# Altium PCB PCB2.PcbDoc (part 2 of 3)
Units mm, origin at the board's own origin, x right, y up, seen from the top; angles counter-clockwise.
Board outline 227.2 x 157.1 mm, 2 copper layers (Top Layer, Bottom Layer); 299 components, 0 nets, 1015 pads, 1172 vias.
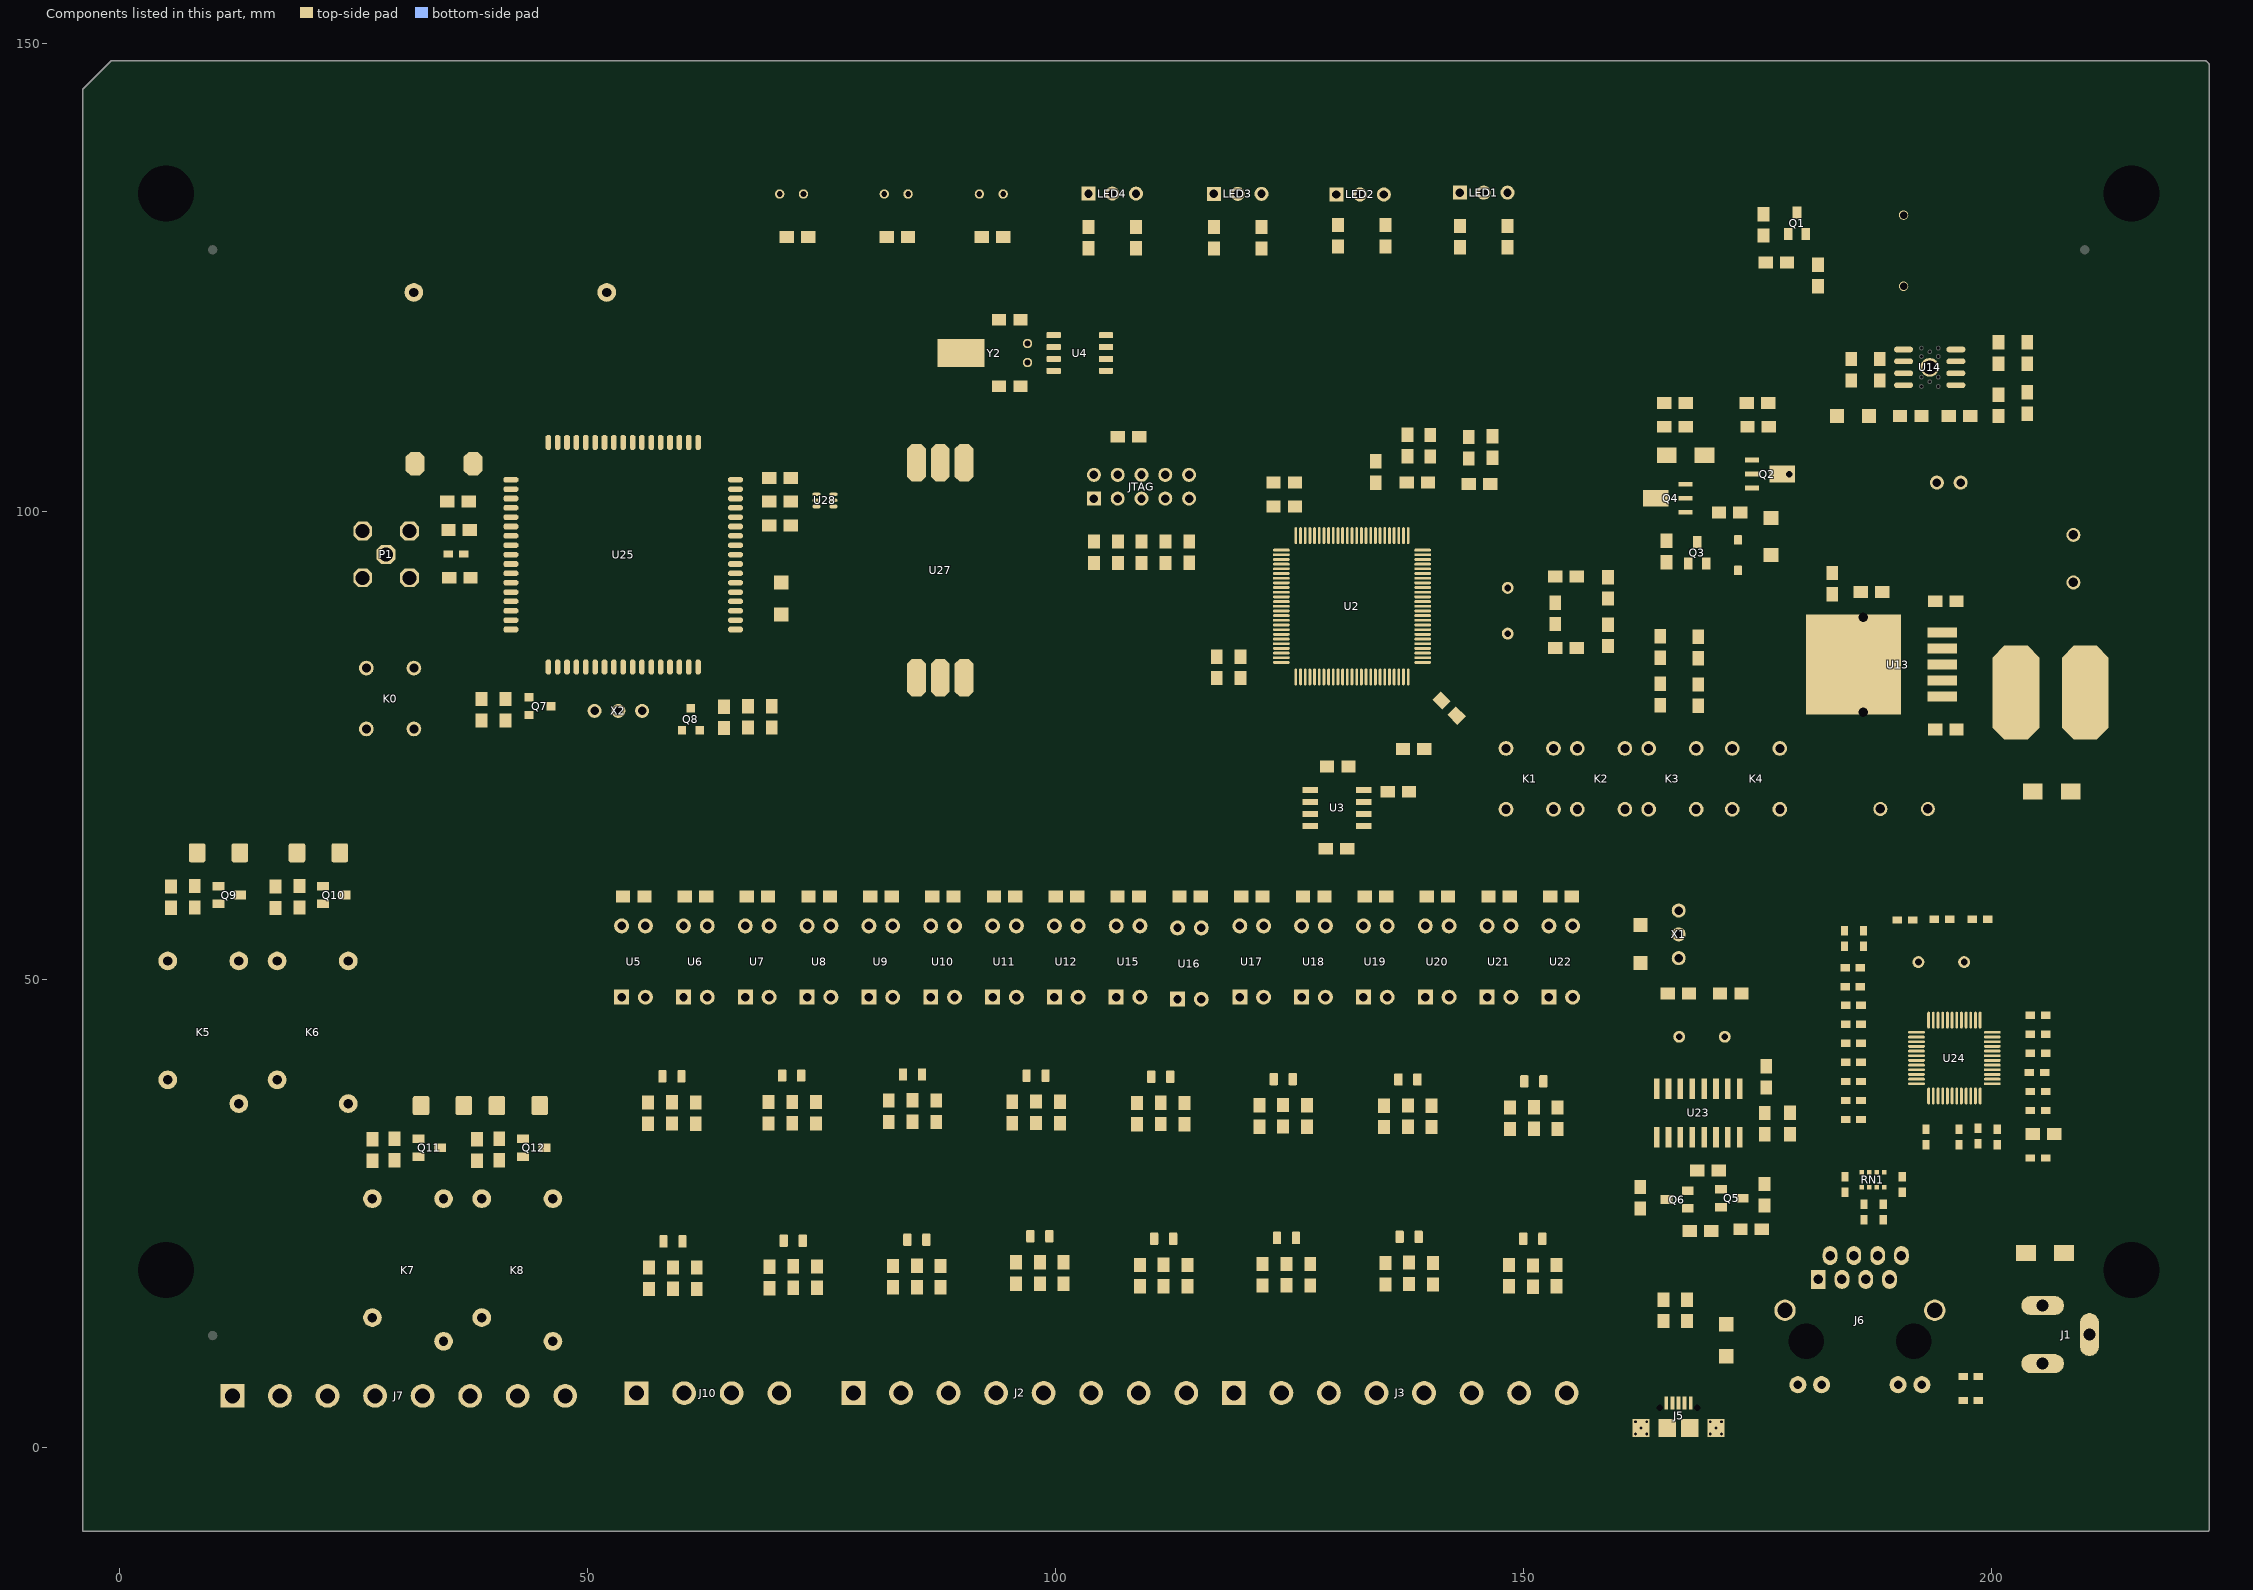
[diagram p2: the components of this part, seen from the top]

## Via types
v1: diameter 0.5, hole 0.3, Top Layer to Bottom Layer, tented both sides, 1160 vias
v2: diameter 1, hole 0.5, Top Layer to Bottom Layer, tented both sides, 8 vias
v3: diameter 0.7, hole 0.5, Top Layer to Bottom Layer, tented both sides, 2 vias
v4: diameter 0.7, hole 0.3, Top Layer to Bottom Layer, tented both sides, 1 vias
v5: diameter 1.2, hole 0.5, Top Layer to Bottom Layer, tented both sides, 1 vias

## Nets (pads, with @x,y where several pads share a name; then routed paths per layer and width w, separated by ;. In a path a pad name is that pad's centre, name@x,y a point inside that pad or via, vN(x,y) a via of type N, cw(c..) or ccw(c..) an arc to the next point about the centre after c; other vN are vias at no path point) (continued)
copper on no net: | length 9679.2
  Top Layer w0.254: 16.702,59.981 16.82,59.981 ; 27.078,32.973 27.181,32.973 ; 37.412,101.033 37.35,101.095 37.822,101.443 37.822,105.159 ; 37.468,95.507 37.54,95.435 37.55,95.425 ; 38.242,32.977 38.357,32.977 ; 38.738,79.744 38.738,80.013 ; 41.858,89.435 43.299,89.435 43.809,89.944 43.809,122.679 47.65,126.52 83.166,126.52 84.288,127.642 84.288,129.387 ; 41.858,90.435 41.858,91.435 41.858,92.435 41.858,93.435 41.858,94.435 ; 41.858,96.435 41.853,96.435 41.853,97.435 41.858,97.435 ; 41.858,101.435 41.858,102.435 ; 41.858,103.435 43.199,104.776 43.199,123.382 47.15,127.333 72.574,127.333 73.62,128.379 73.62,129.387 ; 42.625,80.201 43.786,80.201 ; 48.858,83.435 48.858,88.553 44.393,93.018 44.393,122.035 48.04,125.682 93.326,125.682 94.448,126.804 94.448,129.387 ; 50.858,107.435 51.858,107.435 ; 53.694,48.151 50.994,45.451 50.994,27.43 54.085,24.339 59.55,24.339 60.186,23.703 60.186,22.067 ; 53.694,59.079 53.694,65.697 54.4,66.403 112.1,66.403 ; 60.082,39.703 63.622,43.243 101.618,43.243 106.526,48.151 ; 60.298,48.151 58.946,46.799 55.635,46.799 51.502,42.665 51.502,27.641 54.295,24.847 72.45,24.847 73.038,24.259 73.038,22.143 ; 60.446,58.931 60.446,64.349 61.9,65.803 113,65.803 116.3,69.103 116.3,77.203 119.4,80.303 126.166,80.303 127.218,81.355 127.218,82.369 ; 61.606,34.623 61.606,29.547 62.75,28.403 154.55,28.403 155.15,27.803 155.15,14.103 154.418,13.371 126.592,13.371 119.094,5.873 ; 61.71,16.987 61.71,15.068 62.225,14.553 77.575,14.553 78.454,13.674 78.454,5.873 ; 62.04,76.679 64.422,76.679 64.646,76.903 64.838,76.903 ; 65.856,87.435 65.858,87.435 ; 65.858,99.435 v1(67.118,99.435) ; 66.902,48.151 65.042,46.291 55.846,46.291 52.01,42.455 52.01,27.851 54.506,25.355 85.313,25.355 86.25,24.418 86.25,22.243 ; 66.902,55.771 66.902,58.783 ; 67.05,58.783 67.05,58.931 67,58.881 67,64.203 68,65.203 113.3,65.203 116.8,68.703 116.8,76.903 119.7,79.803 126.428,79.803 127.718,81.093 127.718,82.369 ; 69.374,34.671 71.902,34.671 71.914,34.683 ; 69.472,103.635 69.488,103.635 ; 69.482,19.349 72.022,19.349 ; 72.022,19.403 72.022,19.349 ; 72.87,39.783 75.822,42.735 107.874,42.735 113.078,47.939 ; 73.506,48.151 71.138,45.783 56.056,45.783 52.518,42.245 52.518,28.061 54.716,25.863 98.55,25.863 99.39,25.023 99.39,22.619 ; 73.654,58.931 73.654,63.657 74.6,64.603 112.9,64.603 113.6,64.603 117.3,68.303 117.3,76.603 120,79.303 126.69,79.303 128.218,80.831 128.218,82.369 ; v1(73.732,100.587) 74.501,100.587 ; 74.454,34.671 74.454,29.799 75.342,28.911 154.76,28.911 155.658,28.013 155.658,13.893 154.628,12.863 131.164,12.863 124.174,5.873 ; 74.562,17.103 74.562,15.566 74.9,15.228 82.675,15.228 83.534,14.369 83.534,5.873 ; 74.562,19.389 74.522,19.349 72.022,19.349 ; 75.35,99.253 75.35,101.003 75.584,101.237 76.33,101.237 ; 76.33,100.587 77.159,100.587 77.55,100.978 77.55,103.127 ; 77.118,103.635 77.55,103.203 ; 80.11,48.151 77.234,45.275 56.267,45.275 53.026,42.034 53.026,28.272 54.927,26.371 111.55,26.371 112.61,25.311 112.61,22.343 ; 80.258,58.931 80.258,62.761 81.5,64.003 113.8,64.003 117.8,68.003 117.8,76.303 120.3,78.803 126.977,78.803 128.718,80.544 128.718,82.369 ; 81.752,133.959 81.752,129.637 82.002,129.387 ; 82.694,17.163 85.222,17.163 85.234,17.175 ; 85.782,39.903 88.106,42.227 113.81,42.227 119.734,48.151 ; 86.714,48.151 83.33,44.767 56.477,44.767 53.534,41.824 53.534,28.482 55.137,26.879 124.85,26.879 125.73,25.999 125.73,22.443 ; 86.862,58.931 86.862,62.265 88,63.403 114.1,63.403 118.3,67.603 118.3,76.003 120.6,78.303 127.239,78.303 129.218,80.282 129.218,82.369 ; 87.306,34.823 87.306,30.147 88.034,29.419 154.971,29.419 156.166,28.224 156.166,13.682 154.839,12.355 135.736,12.355 129.254,5.873 ; 87.774,17.163 88.614,16.323 88.614,5.873 ; 90.276,105.267 90.276,105.286 ; 93.318,48.151 89.426,44.259 56.688,44.259 54.042,41.613 54.042,28.693 55.348,27.387 137.85,27.387 138.838,26.399 138.838,22.551 ; 93.466,58.931 93.466,61.569 94.7,62.803 114.3,62.803 118.8,67.303 118.8,75.703 120.9,77.803 127.476,77.803 129.718,80.045 129.718,82.369 ; 93.694,5.873 93.694,14.397 94.775,15.478 100.55,15.478 100.914,15.842 100.914,17.539 ; 94.006,113.414 94.006,113.419 ; 98.774,5.873 108.688,15.787 113.43,15.787 114.134,16.491 114.134,17.263 ; 98.982,39.771 100.93,41.719 119.906,41.719 126.338,48.151 ; 99.922,48.151 95.522,43.751 56.898,43.751 54.7,41.553 54.7,28.903 55.708,27.895 57.4,27.895 151.158,27.895 152.054,26.999 152.054,22.343 ; 100.07,58.931 100.07,60.903 101.37,62.203 114.6,62.203 ; 100.506,34.691 100.506,30.747 101.326,29.927 155.181,29.927 156.674,28.434 156.674,13.472 155.005,11.803 140.264,11.803 134.334,5.873 ; 102.356,58.931 102.356,59.642 ; 103.566,128.161 103.566,126.919 104.15,126.335 112.35,126.335 114.218,124.467 122.368,124.467 127.718,119.117 127.718,97.469 ; 103.854,5.873 113.059,15.078 126.875,15.078 127.254,15.457 127.254,17.363 ; 104.15,103.963 104.15,106.785 105.392,108.027 106.69,108.027 ; 105.436,116.34 118.945,116.34 120.55,114.735 120.55,94.303 122.434,92.419 124.168,92.419 ; 105.436,117.61 119.275,117.61 121.25,115.635 121.25,94.569 122.9,92.919 124.168,92.919 ; 105.467,115.039 105.436,115.07 117.95,115.07 119.882,113.138 119.882,94.003 121.966,91.919 124.168,91.919 ; 106.572,59.033 106.674,58.931 106.674,60.703 107.574,61.603 114.9,61.603 119.8,66.503 119.8,75.203 121.4,76.803 128.025,76.803 130.718,79.496 130.718,82.369 ; 108.646,128.161 111.724,128.161 114.718,125.167 122.768,125.167 128.218,119.717 128.218,97.469 ; 108.934,5.873 117.448,14.387 139.546,14.387 140.362,15.203 140.362,17.471 ; 109.054,17.263 111.582,17.263 111.594,17.275 ; 109.799,66.403 112.1,66.403 ; 112.306,39.651 113.866,41.211 126.002,41.211 132.942,48.151 ; 113.278,58.931 113.278,59.081 120.3,66.103 120.3,74.903 121.7,76.303 128.338,76.303 131.218,79.183 131.218,82.369 ; 113.83,34.571 113.83,31.323 114.718,30.435 155.392,30.435 157.182,28.645 157.182,13.261 155.216,11.295 144.836,11.295 139.414,5.873 ; 114.014,5.873 122.02,13.879 152.754,13.879 153.578,14.703 153.578,17.263 ; 114.33,94.557 114.344,94.557 ; 114.6,62.248 114.6,62.203 ; 116.966,128.141 116.966,126.569 117.7,125.835 123,125.835 128.718,120.117 128.718,97.469 ; 117.265,84.534 117.353,84.622 ; 119.882,58.931 119.882,59.803 120.9,60.821 120.9,74.703 121.9,75.703 128.449,75.703 131.718,78.972 131.718,82.369 ; 122.046,128.141 129.218,120.969 129.218,97.469 ; v1@122.2,87.419 124.168,87.419 ; v1(122.9,86.919) 124.168,86.919 ; 124.168,83.919 125.204,83.919 ; 124.168,85.419 v1(125.47,85.419) ; 125.39,39.403 126.69,40.703 132.098,40.703 139.546,48.151 ; 125.622,103.127 126.218,102.531 126.218,97.469 ; 125.687,96.303 125.687,97.438 ; 125.687,97.469 125.687,97.438 ; 125.718,82.765 125.718,82.369 125.718,83.665 126.856,84.803 v1(127.45,84.803) ; 125.718,97.469 125.687,97.438 ; 125.814,59.603 125.3,60.117 125.3,74.403 125.9,75.003 128.562,75.003 133.218,79.659 133.218,82.369 ; 126.218,82.369 126.218,83.352 126.841,83.975 v1(127.095,83.975) ; 126.718,82.369 126.718,81.49 125.981,80.753 118.95,80.753 115.8,77.603 115.8,69.503 112.7,66.403 112.1,66.403 ; 126.914,34.323 126.914,31.939 127.91,30.943 155.602,30.943 157.69,28.855 157.69,13.051 155.426,10.787 149.408,10.787 144.494,5.873 ; 129.718,97.469 129.718,128.357 ; 129.718,127.845 130.23,128.357 ; 130.218,82.369 130.218,79.783 127.738,77.303 121.2,77.303 119.3,75.403 119.3,66.903 114.6,62.203 ; 130.218,97.469 130.218,103.503 ; 130.218,104.322 130.218,103.503 ; 130.718,97.469 130.718,119.935 130.718,119.953 135.3,124.535 142.15,124.535 143.25,125.635 143.25,128.261 ; 131.218,97.469 131.218,119.535 135.618,123.935 147.33,123.935 148.33,124.935 148.33,128.261 ; 131.338,72.813 131.338,73.333 ; 131.718,97.469 131.718,119.135 135.918,123.335 175.05,123.335 175.914,124.199 175.914,126.647 ; v1(131.8,84.103) 132.218,83.685 132.218,82.369 ; 132.218,98.75 132.218,97.469 132.218,102.471 132.874,103.127 134.258,103.127 ; 132.718,82.369 v1(132.718,84.203) ; 133.39,59.403 133.09,59.703 134.29,60.903 138.6,60.903 141.345,63.648 141.345,75.263 140.049,76.559 135.782,76.559 135.218,77.123 135.218,82.369 ; 134.718,97.469 v1@134.718,99.647 ; 135.218,97.469 v1@135.218,98.946 ; 135.31,128.357 135.31,126.027 130.218,120.935 130.218,103.503 ; 135.718,82.369 135.718,77.41 136.061,77.067 140.26,77.067 141.853,75.474 141.853,62.956 139.694,60.797 139.694,58.931 ; v1(135.718,96.193) 135.718,97.469 ; 136.218,82.369 136.218,78.002 136.646,77.575 140.47,77.575 142.621,75.424 142.621,62.608 146.298,58.931 146.298,55.919 146.15,55.771 ; 136.218,97.469 v1(136.218,99.977) ; 136.718,82.369 136.718,78.467 137.027,78.159 140.659,78.159 143.307,75.51 143.307,63.396 145.4,61.303 151.8,61.303 152.902,60.201 152.902,58.931 152.419,59.414 ; 136.718,96.294 136.718,97.469 ; 136.806,22.551 136.806,21.669 137.822,20.653 137.822,19.811 ; 137.218,97.469 137.218,98.871 137.338,98.991 v1(137.338,100.892) ; 137.56,103.127 137.56,102.103 137.96,101.703 142.325,101.703 142.775,101.253 142.775,95.128 141.566,93.919 139.268,93.919 ; v1(137.937,94.919) 139.268,94.919 ; 138.093,88.919 139.268,88.919 ; 138.702,39.359 144.506,39.359 146.15,41.003 146.15,48.151 ; 139.268,84.419 141.8,84.419 150.952,75.266 150.952,73.072 155.791,68.234 155.791,74.734 ; 139.268,84.919 142.3,84.919 150.869,76.35 155.626,76.35 ; 139.268,85.419 142.9,85.419 151.269,77.05 170.027,77.05 172.343,74.734 172.343,68.234 ; 139.268,89.419 145.934,89.419 148.355,86.998 152.419,86.998 153.435,88.014 153.435,85.474 ; 139.268,89.919 146.396,89.919 148.355,91.878 151.857,91.878 153.435,90.3 153.435,93.094 ; 139.268,91.419 142.141,91.419 145.873,95.151 160.51,95.151 161.45,94.212 v1(161.45,89.203) ; 139.268,91.919 141.916,91.919 145.707,95.71 161.018,95.71 ; 139.268,92.919 142.16,92.919 143.766,94.525 143.766,100.285 146.48,102.999 146.734,103.253 ; 139.268,93.419 141.766,93.419 143.258,94.911 143.258,101.52 142.55,102.228 140.745,102.228 139.846,103.127 ; 139.268,94.419 141.266,94.419 142.05,95.203 v1(142.05,101.053) ; 139.268,95.419 140.698,95.419 v1(141.3,96.021) ; 139.268,95.919 v1(139.268,96.771) ; 139.592,83.919 139.268,83.919 141.384,83.919 148.298,77.005 148.298,68.234 ; 140.226,34.279 140.226,32.327 141.102,31.451 155.812,31.451 158.198,29.066 158.198,12.84 151.23,5.873 149.574,5.873 ; v1(142.05,103.003) 144.19,103.003 ; 144.194,102.559 144.194,102.999 ; 150.022,22.343 150.022,21.415 151.038,20.399 151.038,19.549 151.038,19.503 ; 152.158,39.159 152.158,47.555 152.754,48.151 ; 153.682,34.079 153.682,32.771 154.494,31.959 156.023,31.959 158.675,29.307 158.675,9.894 154.654,5.873 ; 155.289,76.35 155.626,76.35 ; 155.764,74.734 155.791,74.734 ; 155.791,74.847 155.791,74.734 ; 159.069,87.951 159.071,87.951 ; 159.069,90.745 159.071,90.745 ; 159.071,85.665 159.527,85.665 ; v1(159.5,103.603) 159.5,99.203 163.3,95.403 163.3,88.066 164.653,86.713 ; 161.009,95.719 161.018,95.71 ; 162.51,25.587 163.194,24.903 166.906,24.903 167.59,25.587 ; 162.51,27.873 163.511,27.873 166.841,31.203 168.35,31.203 169.337,32.19 169.337,33.195 ; 163.411,68.234 163.411,74.734 161.795,76.35 155.626,76.35 ; 164.15,104.203 164.162,104.203 ; 164.162,101.457 164.162,104.203 ; 164.653,81.633 164.653,84.427 162.576,84.427 162,85.003 162,88.513 162.327,88.84 162.327,94.401 161.018,95.71 ; 164.997,104.05 164.997,105.72 ; 165,99.953 165,100.424 165.483,100.424 166.516,101.457 ; 165.45,101.003 165.45,101.457 166.516,101.457 ; 165.701,16.557 165.75,16.607 ; 167.362,101.457 166.516,101.457 ; 167.59,27.492 167.59,28.635 168.606,29.651 ; 167.902,4.923 167.902,4.802 167.902,7.404 ; 168.713,81.573 168.713,84.367 ; 168.713,86.653 168.713,90.658 169.75,91.695 173.66,91.695 176.506,94.541 176.506,95.385 ; 170.892,29.651 170.892,27.873 171.146,27.619 ; 173.147,38.395 173.147,38.832 174.129,38.832 174.457,38.503 ; 173.896,111.641 173.896,110.385 173.966,110.315 173.966,109.101 ; 174.474,104.045 175.837,104.045 ; 175.881,37.079 175.214,37.747 174.457,38.503 ; 175.97,38.503 174.457,38.503 ; v1(176.75,92.253) 176.1,91.603 176.1,59.403 178.8,56.703 184.34,56.703 ; 179.351,7.233 179.351,6.753 179.351,5.594 179.87,5.075 196.995,5.075 ; 181.882,6.753 181.882,7.785 202.9,28.803 207,28.803 208.4,30.203 208.4,46.403 207.1,47.703 199.8,47.703 198.824,46.727 198.824,45.701 ; 184.066,18.003 184.7,18.003 186.665,19.967 186.665,24.158 186.436,24.387 ; 184.066,18.483 184.723,18.483 ; 184.34,55.258 184.34,56.703 ; 186.038,78.306 186.328,78.596 ; 186.041,49.271 187.282,49.271 187.95,48.603 187.95,46.603 190.652,43.901 192.024,43.901 ; 186.041,51.303 187.75,51.303 188.55,50.503 188.55,46.903 191.052,44.401 192.024,44.401 192.852,44.401 v1(193.75,43.503) ; 186.097,35.103 188.15,35.103 189.15,36.103 189.15,39.503 190.048,40.401 192.024,40.401 191.048,40.401 ; 186.097,37.135 187.882,37.135 188.65,37.903 188.65,39.803 188.65,39.901 189.65,40.901 192.024,40.901 ; 186.097,39.167 186.816,39.167 189.05,41.401 192.024,41.401 ; 186.097,41.199 187.346,41.199 188.048,41.901 192.024,41.901 ; 186.097,43.231 187.122,43.231 187.952,42.401 192.024,42.401 ; 186.097,45.263 188.459,42.901 192.024,42.901 ; 186.097,47.295 189.991,43.401 192.024,43.401 ; 186.176,27.867 186.176,26.298 186.436,26.038 ; 186.182,27.873 v1(186.182,28.476) ; 186.328,88.756 186.328,86.727 185.278,85.677 185.278,83.695 ; 186.372,55.258 187,55.258 187.8,54.458 187.8,53.203 193.324,47.679 193.324,45.701 192.847,46.178 v1(192.2,46.178) ; 186.969,27.874 v1(186.969,28.476) ; 186.976,27.867 186.976,27.378 188.316,26.038 188.468,26.038 ; 187.776,27.867 v1(187.776,28.457) ; 187.876,20.543 188.468,21.135 188.468,24.387 ; v1@188.002,31.355 v1@188.011,31.364 ; v1(188.011,31.347) v1@188.011,31.364 ; 188.106,116.335 189.249,116.335 189.503,116.081 190.646,116.081 ; 188.36,91.443 188.36,83.695 185.282,83.695 ; 188.576,27.867 v1(188.576,28.457) ; 188.75,81.203 188.75,81.207 188.741,81.198 188.741,81.009 188.353,80.62 186.328,78.596 ; v1(188.808,31.361) 188.808,31.56 193.824,36.576 193.824,37.601 ; 190.057,6.753 188.8,8.01 188.8,13.703 203.2,28.103 207.4,28.103 209,29.703 209,46.803 207.5,48.303 199,48.303 197.824,47.127 197.824,45.701 ; 190.265,110.118 v1@190.265,112.093 ; 190.4,83.153 190.4,83.691 190.4,83.695 190.4,83.797 191.48,83.797 191.586,83.691 192.957,83.691 ; 191.643,56.391 192.234,55.8 192.234,51.911 195.824,48.321 195.824,45.701 ; 191.643,56.483 193.431,56.483 ; 192.024,38.901 192.948,38.901 193.15,39.103 194.65,39.103 ; 192.6,6.753 193.462,7.615 196.995,7.615 ; 193.04,34.039 193.04,34.693 v1(194.55,36.203) 194.824,36.477 194.824,37.601 ; 193.324,37.601 193.324,36.863 188.011,31.55 v1@188.011,31.364 ; 193.824,45.701 193.824,44.429 v1(195.05,43.203) ; 194.324,37.601 194.324,38.777 194.65,39.103 ; 194.324,45.701 v1(194.324,47.077) ; v1(194.513,32.363) 194.513,34.866 195.324,35.677 195.324,37.601 ; v1(194.824,44.403) 194.824,45.701 ; v1@195.15,33.074 195.15,34.703 195.824,35.377 195.824,37.601 ; 195.324,45.701 195.324,47.079 188.6,53.803 188.6,55.903 187.8,56.703 184.34,56.703 ; 195.58,56.483 198.003,56.483 197.114,55.594 197.114,51.911 196.324,51.121 196.324,45.701 ; 196.234,112.931 196.234,113.303 196.234,113.541 ; 196.824,45.701 196.824,39.229 196.95,39.103 ; 197.324,37.601 197.324,38.729 196.95,39.103 ; 197.824,37.601 197.824,34.948 198.614,34.158 ; v1@198.329,41.924 v1(198.352,41.901) 200.124,41.901 ; 200.124,39.401 199.052,39.401 v1(198.25,40.203) 198.448,40.401 200.124,40.401 ; 200.124,42.401 201.801,42.401 204.075,40.127 ; 200.124,43.401 201.348,43.401 202.138,44.191 204.202,44.191 ; 200.124,43.901 201.048,43.901 203.37,46.223 204.202,46.223 ; 164.162,104.203 164.162,104.885 164.997,105.72 ; 164.997,105.72 165.33,106.053 164.997,106.053 164.997,105.72 ; 185.278,83.695 185.282,83.695 ; 185.278,83.695 185.278,79.645 186.328,78.596 ; 185.278,83.695 185.282,83.695 ; 192.957,83.691 194.778,83.691 192.957,83.691 ; 194.65,39.103 196.95,39.103 ; 190.646,114.811 190.9,114.811 190.646,114.811
  Top Layer w0.3: 5.542,59.989 5.542,67.145 7.3,68.903 111.4,68.903 113.4,70.903 113.4,86.903 116.416,89.919 124.168,89.919 ; 16.702,59.981 15.3,61.383 15.3,66.003 17.5,68.203 111.7,68.203 114,70.503 114,74.903 114,86.503 116.916,89.419 124.168,89.419 ; 29.442,33.861 29.442,63.945 33.1,67.603 112,67.603 114.6,70.203 114.6,86.103 117.416,88.919 124.168,88.919 ; 38.242,32.977 38.242,63.545 41.7,67.003 112.4,67.003 115.2,69.803 115.2,85.803 117.816,88.419 124.168,88.419 ; 71.758,98.555 73.732,100.529 v1(73.732,100.587) ; 71.758,101.095 71.9,101.237 v1(73.216,101.237) 73.22,101.241 74.497,101.241 74.501,101.237 ; 117.265,84.534 117.381,84.419 124.168,84.419 ; v1(119.5,86.203) 119.716,86.419 124.168,86.419 ; v1(120.72,87.709) 120.93,87.919 124.168,87.919 ; 125.204,83.919 125.657,84.372 ; 132.974,66.463 137.421,66.463 139.211,68.253 139.211,71.326 137.234,73.303 135.518,73.303 134.218,74.603 134.218,82.369 ; 133.718,82.369 133.718,74.203 135.218,72.703 137,72.703 137.814,71.889 137.814,70.107 ; 134.718,82.369 134.718,75.485 135.524,74.679 137.16,74.679 137.16,74.543 138.8,72.903 v1(139.1,72.903) ; 137.218,82.369 137.218,81.235 138.25,80.203 ; 137.718,97.469 v1(138.566,97.469) ; 139.268,88.419 140.966,88.419 v1(141.25,88.703) ; 139.268,90.419 142.251,90.419 v1(142.491,90.659) ; v1(144.1,73.003) 144.1,63.803 145.9,62.003 156.8,62.003 160.4,58.403 160.4,21.803 161.55,20.653 176.479,20.653 177.063,21.237 177.063,25.251 176.403,25.911 175.768,25.911 ; 168.606,29.651 168.606,30.159 170.607,32.16 170.607,33.195 ; 196.582,34.031 196.824,34.273 v1(196.824,36.203) 196.824,37.601 ; 197.324,45.701 197.324,43.329 ; 200.124,39.901 201.152,39.901 v1(201.697,39.356) 202.55,38.503 202.55,36.403 202.89,36.063 204.202,36.063 ; 200.646,34.031 200.646,34.207 v1(198.598,36.255) 198.324,36.529 198.324,37.601 198.324,39.129 197.324,40.129 197.324,41.429 ; 204.202,38.095 203.958,38.095 201.152,40.901 200.124,40.901 197.852,40.901 197.324,41.429 ; 204.202,42.159 203.46,42.901 v1(201.8,42.901) 200.124,42.901 197.752,42.901 197.324,43.329 ; 197.324,41.429 197.324,43.329
  Top Layer w0.4: 31.496,76.815 31.496,83.315 31.616,83.435 45.858,83.435 45.858,79.529 46.136,79.251 ; 60.858,83.435 60.858,79.261 61.09,79.029 61.25,79.189 64.646,79.189 ; 74.501,101.887 75.334,101.887 ; 87.736,85.576 87.736,82.267 v1(87.736,100.317) ; 164.986,13.557 165.952,12.591 165.952,4.802 ; 166.602,4.802 166.602,12.633 167.526,13.557 ; v1(166.75,18.664) 166.75,16.619 167.526,15.843 ; v1(166.797,36.885) 166.797,38.395 ; v1(168.067,36.809) 168.067,38.395
  Top Layer w0.5: 5.542,57.051 5.542,57.703 5.542,56.161 11.7,50.003 v1(20.5,50.003) ; 5.542,59.989 5.576,60.023 10.622,60.023 ; 8.082,57.737 10.241,57.737 10.622,58.118 ; 8.336,63.579 v1(9.924,63.579) ; 12.798,52.027 12.908,52.137 12.908,59.07 ; 12.908,53.737 12.908,59.07 ; 12.908,63.579 12.908,59.07 ; 16.702,57.695 16.702,55.801 20.5,52.003 v1(20.5,50.003) ; 16.702,59.981 16.744,60.023 21.798,60.023 ; v2(16.826,63.579) 19.004,63.579 ; 19.258,57.737 21.417,57.737 21.798,58.118 ; 20.684,30.687 27.078,30.687 27.078,30.129 ; 23.576,63.579 24.084,63.071 24.084,59.07 ; 24.084,54.025 24.084,59.07 ; 24.482,52.027 24.084,52.425 24.084,59.07 ; 27.078,32.973 27.128,33.023 31.982,33.023 ; 29.442,30.737 31.601,30.737 31.982,31.118 ; 31.496,123.447 31.496,132.931 36.337,137.772 96.7,137.772 ; 32.334,36.503 32.258,36.579 v1(33.924,36.579) ; 34.666,26.627 34.268,27.025 34.268,32.07 36.83,34.632 36.83,36.579 ; 37.468,98.047 38.08,97.435 41.853,97.435 41.858,97.435 ; 37.54,95.435 41.858,95.435 ; 37.55,92.967 37.55,95.425 ; 38.242,30.294 38.242,30.691 36.5,28.949 36.5,24.947 35,23.447 21.856,23.447 20.5,24.803 v1(20.5,50.003) ; 38.288,33.023 43.158,33.023 ; 38.738,77.727 38.738,76.124 39.675,75.187 52.476,75.187 53.34,76.051 53.34,78.743 ; 38.738,80.013 38.926,80.201 43.786,80.201 ; 40.364,36.579 v1(42.174,36.579) ; 40.618,30.737 42.777,30.737 43.158,31.118 ; 41.278,77.727 43.212,77.727 43.786,78.301 ; 44.936,36.579 45.444,36.071 45.444,32.07 45.444,27.533 46.35,26.627 ; 53.694,55.771 53.694,58.783 ; 53.858,83.435 v1(53.858,85.345) ; 54.858,83.435 v1(54.858,84.845) ; 56.128,58.931 57.322,58.931 58.25,58.003 58.25,54.303 v1(58.85,53.703) 78.05,53.703 ; 56.526,36.909 56.526,38.179 58.05,39.703 ; 56.63,19.273 56.63,20.543 58.154,22.067 ; 57.858,105.011 57.858,107.435 ; 60.14,76.679 60.14,75.289 60.776,74.654 66.796,74.654 67.186,75.044 67.186,76.965 69.726,76.965 ; 60.446,55.919 60.446,58.931 ; 62.732,58.931 64.122,58.931 64.85,58.203 64.85,53.803 ; 63.1,98.503 63.168,98.435 65.858,98.435 ; 64.1,88.003 64.668,87.435 65.858,87.435 69.147,87.435 70.742,89.03 ; 65.858,95.435 67.766,95.435 70.742,92.459 ; 65.858,100.435 64.357,100.435 63.925,100.866 63.925,103.914 64.535,104.524 68.583,104.524 69.472,103.635 ; 65.858,101.435 66.592,101.435 69.472,98.555 ; 65.858,102.435 67.818,102.435 69.158,101.095 69.472,101.095 ; 69.336,58.931 70.922,58.931 71.45,58.403 71.45,53.803 ; 69.374,36.957 69.374,38.319 70.838,39.783 ; 69.482,19.349 69.482,20.619 71.006,22.143 ; 69.726,79.251 v1(69.726,85.398) ; 70.576,133.959 70.576,130.145 71.334,129.387 ; 71.758,103.635 77.118,103.635 83.564,103.635 85.196,105.267 ; 73.654,55.919 73.654,58.931 ; 75.94,58.931 77.322,58.931 78.05,58.203 78.05,53.703 ; 80.258,55.919 80.258,58.931 ; 82.226,37.109 82.226,38.379 83.75,39.903 ; 82.544,58.931 84.222,58.931 84.75,58.403 84.75,53.703 ; 82.694,19.449 82.694,20.719 84.218,22.243 ; 85.196,85.157 85.196,82.267 85.261,82.332 v1(85.261,99.876) ; 86.862,55.919 86.862,58.931 ; 89.148,58.931 90.822,58.931 91.25,58.503 91.25,53.703 ; 90.276,85.917 90.276,82.267 v1(90.276,100.384) ; 91.912,133.959 91.912,129.637 92.162,129.387 ; 93.466,55.919 93.466,58.931 ; 95.426,36.977 95.426,38.247 96.95,39.771 ; 95.752,58.931 97.122,58.931 97.85,58.203 97.85,53.803 ; 95.834,19.825 95.834,21.095 97.358,22.619 ; 96.882,137.772 99.3,135.354 99.3,125.016 105.436,118.88 ; 100.07,55.919 100.07,58.931 ; 102.356,58.931 103.722,58.931 104.45,58.203 104.45,53.703 ; 103.566,130.447 103.566,134.003 ; 106.674,55.919 106.674,58.931 ; 108.646,130.447 108.646,134.003 ; 108.75,36.857 108.75,38.127 110.274,39.651 ; 108.96,58.931 110.522,58.931 111.05,58.403 111.05,53.703 ; 109.054,19.549 109.054,20.819 110.578,22.343 ; 113.278,55.759 113.278,58.931 ; 115.564,58.931 117.122,58.931 117.65,58.403 117.65,53.703 ; 116.966,130.427 116.966,133.983 ; 119.882,55.919 119.882,58.931 ; 121.834,36.609 121.834,37.879 123.358,39.403 ; 122.046,130.427 122.046,133.983 ; 122.168,58.931 123.722,58.931 124.25,58.403 124.25,53.703 ; 122.174,19.649 122.174,20.919 123.698,22.443 ; 125.595,84.434 130.064,88.903 ; 125.687,96.303 125.687,96.077 126.761,95.003 136.265,95.003 136.718,95.456 ; 126.486,55.919 126.486,58.931 ; 127.274,70.273 129.052,72.051 129.052,72.813 ; 128.772,58.931 130.322,58.931 130.95,58.303 130.95,53.703 ; 128.924,64.011 129.35,64.437 129.35,69.503 130.1,70.253 ; 130.042,133.911 130.042,130.831 130.23,130.643 ; 130.12,70.273 132.974,70.273 ; 130.188,88.903 v2@136.718,88.903 ; 131.21,64.011 132.455,64.011 132.974,64.53 132.974,66.463 ; 131.338,72.813 132.974,71.177 132.974,70.273 ; 132.942,55.771 133.09,55.919 133.09,58.931 ; 132.974,67.733 133.967,67.733 134.588,68.354 137.281,68.354 137.814,68.888 137.814,70.107 ; 135.122,133.911 135.122,130.831 135.31,130.643 ; 135.146,36.565 135.146,37.835 136.67,39.359 ; 135.282,19.757 135.282,21.027 136.806,22.551 ; 135.376,58.931 136.922,58.931 137.45,58.403 137.45,53.703 ; v1(136.7,71.803) 135.9,71.803 135.528,71.431 135.528,70.107 135.362,70.273 132.974,70.273 ; 136.718,96.294 v1(136.718,92.803) v2@136.718,88.903 ; v2(136.75,88.903) 138.077,88.903 ; 139.546,55.771 139.694,55.919 139.694,58.931 ; 141.417,79.991 136.718,84.69 v2@136.718,88.903 ; 141.98,58.931 v1(143.522,58.931) ; 143.25,130.547 143.25,134.103 ; 148.33,130.547 148.33,134.103 ; 148.498,19.549 148.498,20.819 150.022,22.343 ; 148.584,58.931 v1(150.222,58.931) ; 148.602,36.365 148.602,37.635 150.126,39.159 ; 152.754,55.771 152.902,55.919 152.902,58.931 ; 155.188,58.931 v1(156.722,58.931) 157.35,58.303 157.35,54.403 156.65,53.703 137.45,53.703 ; v1(157.223,91.574) 158.68,93.031 159.071,93.031 ; v5(157.45,112.103) 157.45,117.985 160.3,120.835 179.5,120.835 181.502,122.837 181.502,124.107 ; v1(158.7,67.44) 158.7,62.793 158.7,62.791 166.624,54.867 ; v1(162.3,34.003) 162.3,51.539 162.56,51.799 ; 162.56,55.883 166.116,52.327 166.624,52.327 ; 164.162,101.457 165.45,101.457 ; 164.257,38.395 164.257,47.36 165.444,48.547 165.444,45.149 166.67,43.923 ; v2(164.4,6.403) 165.302,5.501 165.302,4.802 ; 164.986,15.843 165.651,16.508 165.75,16.508 165.75,16.607 v1(165.75,18.689) ; 165.304,26.539 v1(165.304,27.949) ; 165.527,38.395 165.527,39.98 169.47,43.923 171.55,43.923 173.318,45.691 173.318,48.547 ; v1(165.958,23.195) 167.806,23.195 ; v1(167.114,84.367) 168.713,84.367 ; 167.362,99.957 170.918,99.957 170.918,97.971 169.724,96.777 168.593,96.777 ; 167.64,94.491 165.462,94.491 165.33,94.623 165.33,93.423 166.141,92.611 172.263,92.611 172.95,93.299 172.95,93.759 ; 169.337,38.395 169.337,41.24 170.1,42.003 174.756,42.003 175.97,40.789 ; 170.092,23.195 170.092,21.911 v1(170.5,21.503) 175.1,21.503 175.5,21.903 175.5,23.363 ; 170.607,38.395 v1(170.607,39.903) ; 171.146,25.714 171.146,25.431 173.214,23.363 ; v2(171.704,7.899) 172.999,7.899 173.863,8.763 173.863,16.64 178.029,20.806 178.029,33.046 178.5,33.517 ; 171.877,38.395 v1(171.877,40.603) ; 173.482,26.648 173.482,26.666 173.482,27.537 174.142,28.197 175.768,28.197 ; 173.896,111.641 173.896,110.385 173.896,109.101 173.896,106.123 174.474,105.545 ; 174.474,104.045 175.837,104.045 176.4,104.045 ; 175.67,129.525 178.138,129.525 178.308,129.695 178.308,126.755 178.2,126.647 ; 179.534,131.707 190.646,131.707 ; 183.026,91.189 185.82,91.189 186.074,91.443 ; 184.39,49.271 184.39,41.255 184.446,41.199 ; 184.404,28.959 184.912,29.467 186.176,29.467 186.976,29.467 ; 184.446,35.103 184.446,30.924 184.81,30.559 187.427,30.559 187.776,30.21 187.776,29.467 188.576,29.467 189.992,29.467 190.5,28.959 ; 185.058,116.335 185.312,116.081 188.106,116.081 189.503,116.081 190.646,116.081 ; 185.282,83.695 185.282,83.691 190.4,83.691 191.586,83.691 192.957,83.691 194.778,83.691 ; 188.106,114.049 188.896,114.049 189.658,114.811 190.646,114.811 ; 192.551,110.239 195.472,110.239 ; 194.778,85.391 192.762,85.391 192.15,86.003 192.15,90.024 192.577,90.451 194.016,90.451 194.016,93.769 195.15,94.903 ; 196.234,114.811 198.52,114.811 200.806,112.525 ; 196.234,116.081 200.552,116.081 200.806,115.827 ; 196.234,117.351 v1(198.102,117.351) 198.15,117.303 198.15,119.003 199.05,119.903 204.65,119.903 205.65,118.903 205.65,116.703 204.774,115.827 203.854,115.827 203.854,112.779 ; 200.806,110.239 201.06,110.493 203.854,110.493 ; 200.806,118.113 203.854,118.113 ; 205.853,36.063 205.853,38.095 205.853,42.159 205.853,44.191 205.853,46.223 ; 78.05,53.703 84.75,53.703 ; 84.75,53.703 91.25,53.703 ; 91.25,53.703 104.45,53.703 ; 104.45,53.703 111.05,53.703 ; 111.05,53.703 117.65,53.703 ; 117.65,53.703 124.25,53.703 ; 124.25,53.703 130.95,53.703 ; 130.95,53.703 137.45,53.703
  Top Layer w0.6: 96.292,113.419 97.054,114.181 97.054,115.959 97.435,116.34 99.848,116.34 ; 96.292,120.531 97.054,119.769 97.054,117.991 97.435,117.61 99.848,117.61
  Top Layer w0.7: 99.848,118.88 v2(99.848,120.433) 101.752,120.433 102.65,119.535 102.65,102.023 103.25,101.423 ; 104.15,103.963 104.15,101.423 103.25,101.423 ; 106.69,101.423 106.69,96.857 106.71,96.837 ; 108.976,108.027 108.976,104.217 109.23,103.963 ; 109.23,101.423 109.23,96.857 109.25,96.837 ; 111.77,101.423 111.77,96.857 111.79,96.837 ; 111.79,94.551 109.25,94.551 106.71,94.551 104.17,94.551 102.302,94.551 101.75,95.103 101.75,100.503 102.67,101.423 103.25,101.423 ; 114.31,101.423 114.31,96.863 114.33,96.843 ; 127.274,66.463 127.274,67.733 127.274,69.003 127.274,70.273 ; v1(181.65,48.103) 181.65,50.403 182.55,51.303 184.39,51.303 184.34,51.353 184.34,53.607 186.372,53.607 ; v4(182,39.903) 182,24.359 185.336,21.023 185.336,20.543 ; v4@182.025,39.928 182.786,39.167 184.446,39.167 184.446,37.135 184.446,35.103 ; 198.646,5.075 v1(198.646,6.403) 198.646,7.615 ; 204.202,30.983 204.202,36.063
  Top Layer w1: 12.798,52.027 13.072,52.301 ; 28.522,95.451 28.578,95.507 35.182,95.507 35.182,98.047 ; 37.166,5.913 37.506,5.573 ; 38.17,101.07 39.804,99.435 41.858,99.435 ; 56.526,34.623 59.038,34.623 59.066,34.651 ; 56.526,36.909 59.066,36.909 61.606,36.909 ; 56.63,16.987 59.158,16.987 59.17,16.999 ; 56.63,19.273 59.17,19.273 ; 59.17,19.285 59.17,19.273 ; 61.71,19.273 59.17,19.273 ; 69.374,36.957 71.914,36.957 ; 69.482,17.063 71.968,17.063 72.022,17.117 ; 71.914,36.969 71.914,36.957 ; 74.454,36.957 71.914,36.957 ; 82.226,34.823 84.738,34.823 84.766,34.851 ; 82.226,37.109 84.766,37.109 87.306,37.109 ; 82.694,19.449 85.234,19.449 ; 85.234,19.461 85.234,19.449 ; 87.774,19.449 85.234,19.449 ; 95.426,34.691 97.938,34.691 97.966,34.719 ; 95.426,36.977 97.966,36.977 100.506,36.977 ; 95.834,17.539 98.362,17.539 98.374,17.551 ; 95.834,19.825 98.374,19.825 ; 98.374,19.837 98.374,19.825 ; 100.914,19.825 98.374,19.825 ; 108.75,34.571 111.262,34.571 111.29,34.599 ; 108.75,36.857 111.29,36.857 113.83,36.857 ; 109.054,19.549 111.594,19.549 ; 111.594,19.561 111.594,19.549 ; 114.134,19.549 111.594,19.549 ; 117.265,82.248 119.805,82.248 122.901,82.248 124.168,83.515 ; 121.834,34.323 124.33,34.323 124.358,34.351 ; 121.834,36.609 124.358,36.609 126.914,36.609 ; 122.174,17.363 124.702,17.363 124.714,17.375 ; 122.174,19.649 124.714,19.649 ; 123.336,103.127 123.336,100.587 123.336,99.417 125.35,97.403 ; 124.714,19.661 124.714,19.649 ; 127.254,19.649 124.714,19.649 ; 135.146,34.279 137.658,34.279 137.686,34.307 ; 135.146,36.565 137.686,36.565 140.226,36.565 ; 135.282,17.471 137.768,17.471 137.822,17.525 ; 135.282,19.757 137.822,19.757 140.362,19.757 ; 137.56,103.127 137.646,103.213 137.646,105.945 ; 137.646,108.231 137.646,109.799 138.35,110.503 140.85,110.503 ; 139.846,103.127 140.082,103.363 140.082,105.929 ; v2(141.85,115.503) 140.85,114.503 140.85,113.403 140.85,110.503 ; 144.194,102.999 144.194,105.707 ; 144.194,107.993 144.194,109.659 143.35,110.503 140.85,110.503 ; 146.734,103.253 146.734,105.793 ; 148.498,17.263 150.992,17.263 151.038,17.217 ; 148.498,19.549 151.038,19.549 153.578,19.549 ; 148.602,34.079 151.114,34.079 151.142,34.107 ; 148.602,36.365 151.142,36.365 153.682,36.365 ; 155.721,85.474 158.88,85.474 159.071,85.665 ; 159.069,87.951 159.071,87.953 159.071,90.745 ; 167.73,48.547 171.032,48.547 ; v2(171.704,7.899) 171.704,9.782 ; 171.922,13.429 171.704,13.211 171.704,15.385 v2(171.922,15.603) ; 172.95,97.011 172.95,99.703 173.204,99.957 175.884,99.957 176.506,99.335 ; 173.561,33.609 178.408,33.609 ; 175.814,35.795 175.97,35.951 175.97,37.079 175.97,38.503 ; 176.252,109.101 181.528,109.101 183.026,107.603 ; 176.506,95.385 182.808,95.385 ; 181.502,126.393 188.36,126.393 190.646,124.107 ; 185.058,114.049 188.106,114.049 ; 194.202,103.127 195.472,104.397 195.472,110.239 ; 194.778,81.991 197.55,81.991 ; 196.234,113.303 197.758,111.779 197.758,110.239 197.758,104.143 196.742,103.127
  Top Layer w1.5: 167.362,108.803 169.38,106.785 ; 167.362,109.101 167.362,111.641 ; 169.38,106.053 169.38,106.785 ; 169.38,106.429 169.38,106.785 ; 183.026,95.177 183.026,107.603 183.026,109.731 183.534,110.239 ; 183.3,94.203 183.95,94.853 ; 184.454,94.903 193.973,94.903 195.15,94.903 206.344,94.903 208.788,92.459 210.058,91.189 210.058,80.703 ; 193.4,79.703 193.242,79.545 193.242,69.599 193.242,68.261 194.9,66.603 210.6,66.603 214.6,62.603 214.6,27.647 207.776,20.823 ; 203.726,20.823 203.726,16.99 205.504,15.212
  Top Layer w1.7: 202.658,80.703 202.658,71.917 204.444,70.131
  Top Layer w2: 12.798,36.787 17.186,32.399 17.186,23.003 22,18.189 22,11.003 17.186,6.189 17.186,5.573 ; 27.066,13.927 27.066,10.933 32.426,5.573 ; 34.666,11.387 34.666,8.413 37.506,5.573 ; 37.822,105.159 v2(37.822,109.875) ; 38.75,13.927 38.75,9.409 42.586,5.573 ; 46.35,11.387 46.35,6.889 47.666,5.573 ; v5(157.45,112.103) 164.162,105.391 ; 197.55,81.991 201.37,81.991 202.658,80.703
  Bottom Layer w0.254: v1(53.858,85.345) 53.858,105.21 55.839,107.191 122.012,107.191 122.83,106.373 131.734,97.469 v1(138.566,97.469) ; 54.858,85.103 54.858,105.134 56.382,106.658 121.745,106.658 131.632,96.771 v1(139.268,96.771) ; v1(73.732,100.587) v1@73.79,100.529 ; 106.69,101.423 106.69,98.158 107.309,97.539 122.244,97.539 123.844,95.939 123.844,83.823 124.631,83.036 132.023,83.036 132.718,83.731 v1(132.718,84.203) ; 109.23,101.423 109.23,99.326 109.925,98.631 122.523,98.631 124.53,96.625 124.53,84.356 124.911,83.975 v1(127.095,83.975) ; 109.23,103.963 110.523,102.67 122.549,102.67 126.9,98.318 126.9,86.33 129.127,84.103 v1(131.8,84.103) ; 111.77,101.423 111.77,100.24 112.338,99.673 122.8,99.673 125.47,97.003 v1(125.47,85.419) ; 114.31,101.423 122.779,101.423 126.2,98.002 126.2,86.053 v1(127.45,84.803) ; v1(122.2,87.403) 122.2,83.703 124.3,81.603 124.3,44.103 128.3,40.103 170.407,40.103 v1(170.607,39.903) ; v1(122.9,86.919) 122.9,83.803 124.8,81.903 124.8,44.303 128.5,40.603 v1(171.877,40.603) ; v1(134.722,99.647) 135.661,99.647 136.576,98.733 139.344,98.733 140.919,97.158 174.598,97.158 176.122,95.634 176.122,61.481 189.8,47.803 194.9,47.803 195.65,47.053 195.65,43.803 v1(195.05,43.203) ; v1@135.218,98.946 135.233,98.946 v1@135.276,98.989 ; v1(135.218,99.046) v1@135.276,98.989 ; v1(135.718,96.193) 136.515,95.396 172.958,95.396 174.25,94.104 174.25,88.128 174.25,87.938 174.25,60.878 190.725,44.403 v1(194.824,44.403) ; v1(136.218,99.977) 136.929,99.266 139.598,99.266 141.224,97.641 175.175,97.641 176.75,96.066 v1(176.75,92.253) ; v1(137.937,94.919) 172.292,94.919 173.7,93.511 173.7,60.653 190.45,43.903 193.35,43.903 v1(193.75,43.503) ; v1(141.3,96.021) 141.433,95.888 173.761,95.888 174.9,94.749 174.9,61.103 189.825,46.178 v1(192.2,46.178) ; v1(142.05,101.053) v1(142.05,103.003) ; v1(159.5,103.603) 178.05,103.603 178.45,104.003 ; v1(161.45,89.203) 166.286,84.367 v1(167.114,84.367) ; 181.526,18.003 182.135,18.003 184.074,19.942 184.074,22.38 188.576,26.883 v1(188.576,28.457) 188.576,31.129 v1(188.808,31.361) ; 181.526,18.483 182.158,18.483 ; 182.796,20.543 183.134,20.881 183.134,22.33 187.776,26.972 v1(187.776,28.457) 187.776,31.129 v1@188.002,31.355 ; v1@186.207,28.451 v1(186.182,28.476) 186.182,31.855 187.274,32.947 v1(195.148,32.947) ; v1@186.995,28.502 186.995,31.575 187.782,32.363 v1(194.513,32.363) ; v1(194.324,47.077) 189.826,47.077 175.6,61.303 175.6,95.151 174.152,96.599 140.614,96.599 139.116,98.098 136.166,98.098 v1@135.276,98.989 ; 205.504,9.012 206.444,9.012 ; 209.544,12.112 210.504,12.112
  Bottom Layer w0.3: 106.69,103.963 107.988,105.261 120.847,105.261 134.233,91.875 141.275,91.875 v1(142.491,90.659) v1@142.621,90.529 ; v1(139.1,72.903) 144,72.903 v1(144.1,73.003)
  Bottom Layer w0.4: v1(67.118,99.435) 69.794,102.111 75.11,102.111 75.334,101.887 ; v1(73.216,101.237) 73.27,101.291 74.934,101.291 75.042,101.183 86.87,101.183 v1(87.736,100.317) ; v1@73.732,100.529 v1@73.79,100.529 ; v1(166.75,18.664) 168.067,19.981 v1(168.067,36.809)
  Bottom Layer w0.5: v1(9.924,63.579) v2(16.826,63.579) ; v1(20.5,50.003) 27,50.003 30.7,53.703 v1(58.85,53.703) ; 27.142,36.579 v1(33.924,36.579) v1(42.174,36.579) ; 55.88,78.743 55.88,82.629 56.845,83.594 70.191,83.594 73.1,86.503 119.2,86.503 v1(119.5,86.203) ; v1(69.726,85.398) 71.928,87.6 120.61,87.6 v1(120.72,87.709) ; v1@73.79,100.529 73.84,100.479 84.658,100.479 v1(85.261,99.876) ; 75.334,101.887 89.566,101.887 90.276,101.177 v1(90.276,100.384) ; v1(136.718,92.803) 141.769,92.803 144.323,90.249 155.898,90.249 v1(157.223,91.574) ; v1@142.621,90.529 143.815,89.335 v1(159.074,89.335) 158.7,88.961 v1(158.7,67.44) ; 144.043,64.468 143.522,63.947 v1(143.522,58.931) v1(150.222,58.931) v1(156.722,58.931) ; v1(162.3,34.003) 164.3,34.003 165.304,32.999 v1(165.304,27.949) 165.304,23.849 v1(165.958,23.195) ; v1(165.75,18.689) 165.75,18.853 167.3,20.403 167.3,36.382 v1(166.797,36.885) ; v1(170.5,21.503) 170.5,9.103 v2(171.704,7.899) ; 185.336,21.023 185.336,20.543 ; v1(190.25,112.103) 197.55,112.103 198.102,112.655 v1(198.102,117.351) ; v1(198.646,6.403) 197.246,5.003 188.55,5.003 186.606,6.947 186.606,18.003 ; 185.336,20.543 185.336,19.753 186.606,18.483 186.606,18.003 ; 185.336,20.543 185.336,19.273 186.606,18.003
  Bottom Layer w1: 5.198,52.027 8.022,49.203 18.3,49.203 27.066,40.437 27.066,26.627 30.09,23.603 35.726,23.603 38.75,26.627 ; 16.882,49.221 16.882,52.027 v2@16.882,63.523 ; v2(99.848,120.433) 115.9,120.433 117.701,122.234 ; 116.4,120.933 117.701,122.234 ; 119.506,133.983 119.506,124.039 117.701,122.234 ; 119.606,133.983 119.606,134.003 ; v2(141.85,115.503) 167.262,115.503 ; v2(164.4,6.403) 170.208,6.403 v2(171.704,7.899) ; v2(171.922,15.603) 174.922,18.603 174.922,32.584 176.911,34.572 212.419,34.572 215.9,38.053 215.9,89.403 212.82,92.483 208.438,92.483
  Bottom Layer w1.5: 106.106,134.003 106.106,136.291 107.75,137.935 133.55,137.935 ; 119.506,133.983 119.506,137.191 ; 132.582,133.911 132.582,136.967 133.55,137.935 ; 136.75,67.542 v2(136.75,88.903) ; 136.852,67.542 139.925,64.468 144.043,64.468 165.185,64.468 181.6,48.053 181.6,39.866 181.635,39.83 181.635,39.168 184.2,36.603 ; 145.79,134.103 145.79,137.675 ; 178.45,104.003 179.85,105.403 195.65,105.403 196.742,104.311 196.742,103.127 ; 184.446,36.603 199.5,36.603 201.4,38.503 201.4,104.303 198.2,107.503 168.776,107.503 168.656,107.623 168.58,107.623 v3(168.279,107.924) 167.362,108.841 167.362,135.073 164.5,137.935 133.55,137.935
  Bottom Layer w2: 5.198,39.327 5.198,36.605 12.106,29.697 12.106,5.573 ; 16.882,39.327 16.882,25.121 22.266,19.737 22.266,5.573 ; v2@16.882,63.635 16.882,105.485 23.4,112.003 39.95,112.003 ; 24.482,36.787 22.5,34.805 22.5,24.903 30.7,16.703 30.7,8.927 27.346,5.573 ; v2(37.822,109.875) 39.95,112.003 ; v5@157.35,112.003 39.95,112.003